# Altium PCB Module.PcbDoc (part 3 of 3)
Units mil, origin at the board's own origin, x right, y up, seen from the top; angles counter-clockwise.
Board outline 59055.12 x 27559.06 mil, 2 copper layers (Top Layer, Bottom Layer); 175 components, 152 nets, 576 pads, 116 vias.
Unrouted connection lines stored in the file: 153.
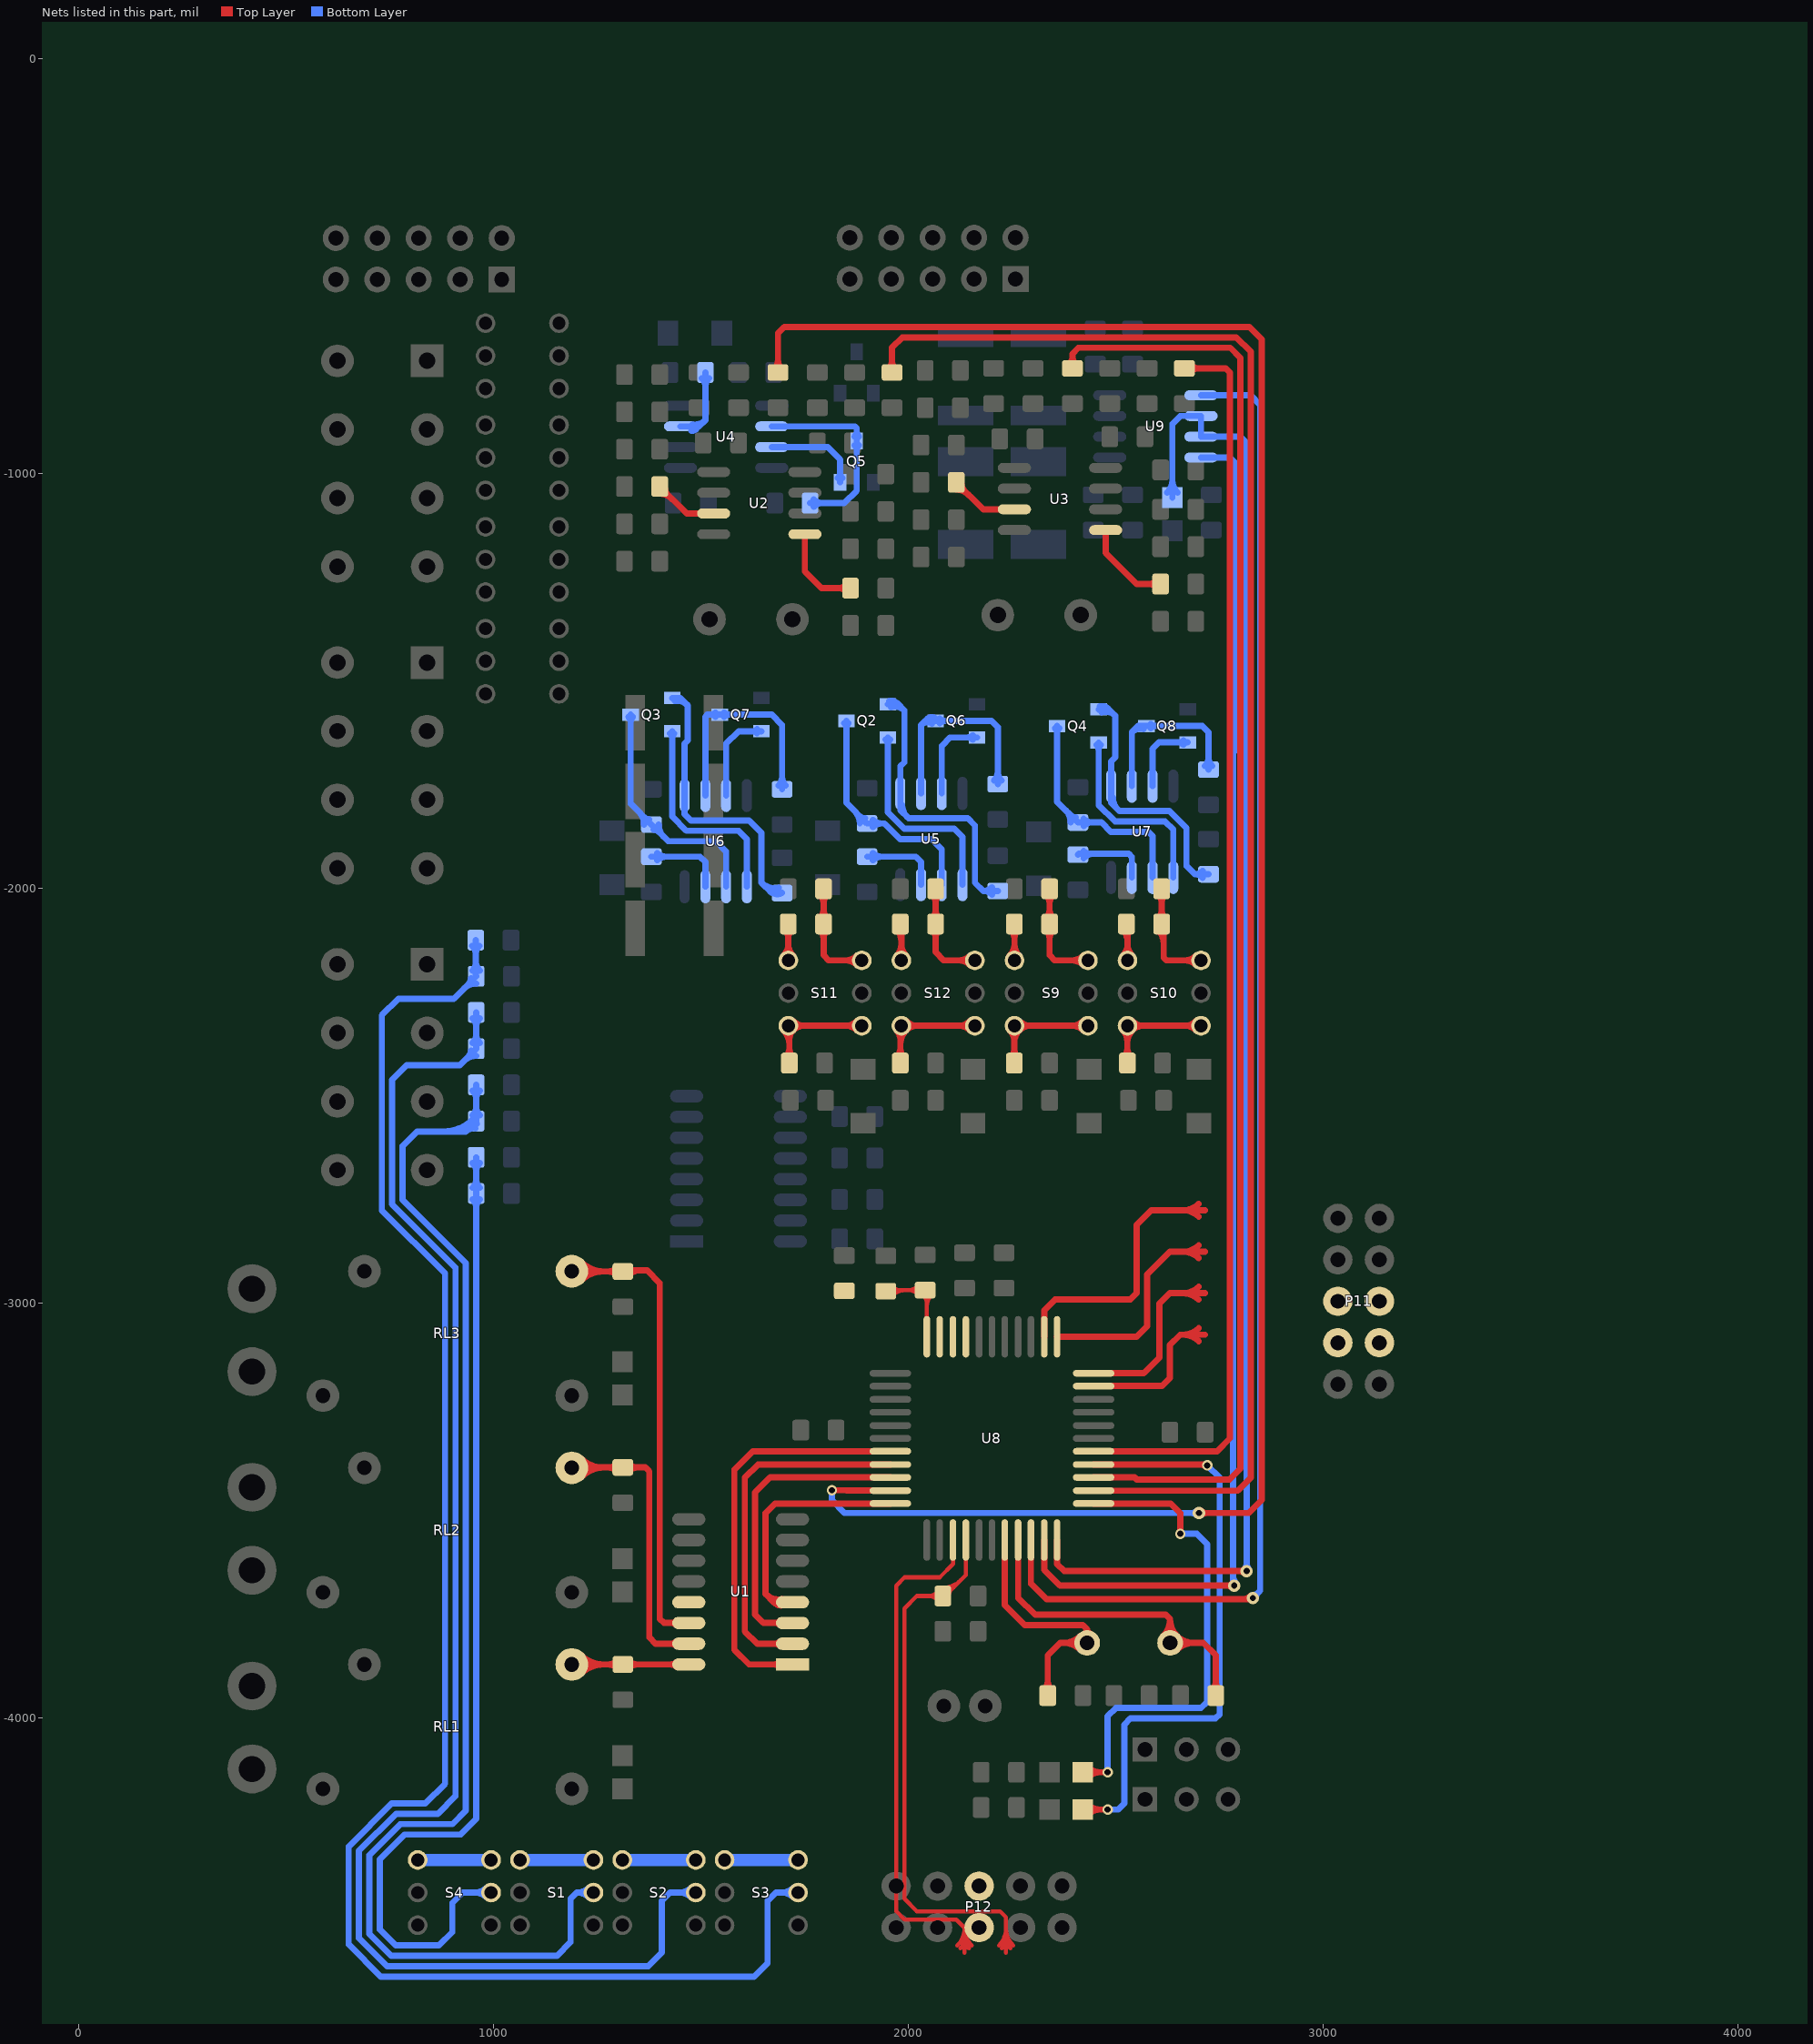
[diagram p3: the nets of this part, all layers, seen from the top]

## Via types
v1: diameter 25, hole 15, Top Layer to Bottom Layer, tented both sides, 99 vias
v2: diameter 30, hole 15, Top Layer to Bottom Layer, tented both sides, 9 vias
v3: diameter 35, hole 25, Top Layer to Bottom Layer, tented both sides, 7 vias
v4: diameter 35, hole 15, Top Layer to Bottom Layer, tented both sides, 1 vias

## Nets (pads, with @x,y where several pads share a name; then routed paths per layer and width w, separated by ;. In a path a pad name is that pad's centre, name@x,y a point inside that pad or via, vN(x,y) a via of type N, cw(c..) or ccw(c..) an arc to the next point about the centre after c; other vN are vias at no path point) (continued)
NetQ2_1: Q2.1 R41.1 U5.5 | length 850.4
  Bottom Layer w15: Q2.1@1950,-1555.67 1975,-1555.67 1990,-1570.67 ; Q2.1@1952.69,-1548.53 cw(c1958.75,-1567.26) 1972.67,-1553.34 ; Q2.1@1957.31,-1562.8 cw(c1967.23,-1593.44) 1990,-1570.67 ; Q2.1@1960.3,-1560.97 cw(c1973.11,-1573.78) 1973.11,-1555.67 cw(c1973.11,-1537.56) Q2.1@1960.3,-1550.37 ; U5.5@1984.5,-1798.67 ccw(c2024.33,-1798.67) 1996.17,-1826.84 ; R41.1@2201.12,-2014.47 ccw(c2180,-2035.42) 2180,-2005.67 ; R41.1@2201.12,-1996.87 cw(c2180,-1975.92) 2180,-2005.67 ; R41.1@2215,-2005.67 2180,-2005.67 ; 1990,-1570.67 1990,-1695.67 1980,-1705.67 1980,-1810.67 2000,-1830.67 2142.5,-1830.67 2160,-1848.17 2160,-1985.67 2180,-2005.67
NetQ2_2: Q2.2 U5.1 | length 528.5
  Bottom Layer w15: Q2.2@1944.7,-1640.97 cw(c1931.89,-1653.78) 1950,-1653.78 cw(c1968.11,-1653.78) Q2.2@1955.3,-1640.97 ; Q2.2@1950,-1635.67 1950,-1816.03 1980,-1846.03 1989.64,-1855.67 2110,-1855.67 2130,-1875.67 U5.1@2130,-1990.67
NetQ2_3: Q2.3 R48.2 U5.2 | length 682.3
  Bottom Layer w15: Q2.3@1844.7,-1600.97 cw(c1831.89,-1613.78) 1850,-1613.78 cw(c1868.11,-1613.78) Q2.3@1855.3,-1600.97 ; Q2.3@1850,-1595.67 1850,-1793.17 R48.2@1900,-1843.17 1941.79,-1843.17 1979.29,-1880.67 2055,-1880.67 2080,-1905.67 U5.2@2080,-1990.67 ; 1870.13,-1813.3 cw(c1840.25,-1843.17) R48.2@1882.5,-1843.17 ; R48.2@1882.2,-1825.37 ccw(c1895,-1812.56) R48.2@1895,-1830.67 ; R48.2@1913.84,-1852.01 cw(c1935.18,-1873.35) 1935.18,-1843.17 cw(c1935.18,-1812.99) R48.2@1913.84,-1834.33
NetQ3_1: Q3.1 R42.1 U6.5 | length 802.8
  Bottom Layer w15: Q3.1@1430,-1540.67 1450,-1540.67 1467.5,-1558.17 ; Q3.1@1436.2,-1548.07 cw(c1441.99,-1583.67) 1467.5,-1558.17 ; 1664.71,-2005.38 ccw(c1684.8,-1985.29) R42.1@1690.5,-2013.12 ; R42.1@1687.49,-1998.42 cw(c1678.09,-1952.58) 1645,-1985.67 ; R42.1@1695,-2010.67 1670,-2010.67 1645,-1985.67 ; 1467.5,-1558.17 1467.5,-1642.92 1460,-1650.42 1460,-1820.67 1475,-1835.67 1615,-1835.67 1645,-1865.67 1645,-1985.67
NetQ3_2: Q3.2 U6.1 | length 551.4
  Bottom Layer w15: Q3.2@1424.7,-1625.97 cw(c1411.89,-1638.78) 1430,-1638.78 cw(c1448.11,-1638.78) Q3.2@1435.3,-1625.97 ; Q3.2@1430,-1620.67 1430,-1826.03 1464.64,-1860.67 1590,-1860.67 1610,-1880.67 U6.1@1610,-1995.67
NetQ3_3: Q3.3 R49.2 U6.2 | length 700.9
  Bottom Layer w15: Q3.3@1324.7,-1585.97 cw(c1311.89,-1598.78) 1330,-1598.78 cw(c1348.11,-1598.78) Q3.3@1335.3,-1585.97 ; Q3.3@1330,-1580.67 1330,-1795.67 R49.2@1380,-1845.67 1420,-1885.67 1535,-1885.67 1560,-1910.67 U6.2@1560,-1995.67 ; 1350.13,-1815.8 cw(c1320.25,-1845.67) R49.2@1362.5,-1845.67 ; R49.2@1362.2,-1827.87 ccw(c1375,-1815.06) R49.2@1375,-1833.17 ; R49.2@1385,-1858.17 cw(c1385,-1876.28) R49.2@1397.8,-1863.47 ; R49.2@1397.5,-1845.67 ccw(c1439.75,-1845.67) 1409.87,-1875.54
NetQ4_1: Q4.1 R46.1 U7.5 | length 779.6
  Bottom Layer w15: Q4.1@2458.21,-1568.17 2483.21,-1568.17 2498.21,-1583.17 ; Q4.1@2460.9,-1561.04 cw(c2466.97,-1579.76) 2480.88,-1565.84 ; Q4.1@2465.52,-1575.31 cw(c2475.44,-1605.94) 2498.21,-1583.17 ; Q4.1@2468.51,-1573.47 cw(c2481.32,-1586.28) 2481.32,-1568.17 cw(c2481.32,-1550.06) Q4.1@2468.51,-1562.87 ; U7.5@2492.71,-1781.17 ccw(c2532.55,-1781.17) 2504.38,-1809.34 ; R46.1@2708.95,-1974.07 ccw(c2690,-1991.25) 2690,-1965.67 ; R46.1@2708.95,-1957.27 cw(c2690,-1940.09) 2690,-1965.67 ; R46.1@2723.21,-1965.67 2690,-1965.67 ; 2498.21,-1583.17 2498.21,-1683.17 2488.21,-1693.17 U7.5@2488.21,-1753.17 2488.21,-1793.17 2508.21,-1813.17 2628.57,-1813.17 2670,-1854.6 2670,-1945.67 2690,-1965.67
NetQ4_2: Q4.2 U7.1 | length 498.5
  Bottom Layer w15: Q4.2@2452.91,-1653.47 cw(c2440.1,-1666.28) 2458.21,-1666.28 cw(c2476.32,-1666.28) Q4.2@2463.51,-1653.47 ; Q4.2@2458.21,-1648.17 2458.21,-1798.53 2497.86,-1838.17 2618.21,-1838.17 2638.21,-1858.17 U7.1@2638.21,-1973.17
NetQ4_3: Q4.3 R51.2 U7.2 | length 669.9
  Bottom Layer w15: Q4.3@2352.91,-1613.47 cw(c2340.11,-1626.28) 2358.21,-1626.28 cw(c2376.32,-1626.28) Q4.3@2363.51,-1613.47 ; Q4.3@2358.21,-1608.17 2358.21,-1790.67 R51.2@2408.21,-1840.67 2465,-1840.67 2487.5,-1863.17 2578.21,-1863.17 2588.21,-1873.17 U7.2@2588.21,-1973.17 ; 2378.34,-1810.8 cw(c2348.46,-1840.67) R51.2@2390.71,-1840.67 ; R51.2@2390.41,-1822.87 ccw(c2403.21,-1810.06) R51.2@2403.21,-1828.17 ; R51.2@2422.05,-1849.51 cw(c2443.39,-1870.85) 2443.39,-1840.67 cw(c2443.39,-1810.49) R51.2@2422.05,-1831.83
NetQ5_2: Q5.2 U4.7 | length 260.9
  Bottom Layer w15: U4.7@1670,-935.67 1805,-935.67 1835,-965.67 Q5.2@1835,-1020.67 ; Q5.2@1829.7,-1010.37 ccw(c1816.89,-997.56) 1835,-997.56 ccw(c1853.11,-997.56) Q5.2@1840.3,-1010.37
NetQ5_3: Q5.3 R43.1 U4.6 | length 586.1
  Bottom Layer w15: U4.6@1670,-885.67 1870,-885.67 1875,-890.67 Q5.3@1875,-920.67 1875,-1035.67 1875,-1040.42 1844.75,-1070.67 R43.1@1762.5,-1070.67 ; R43.1@1771.34,-1079.51 cw(c1792.68,-1100.85) 1792.68,-1070.67 cw(c1792.68,-1040.49) R43.1@1771.34,-1061.83 ; Q5.3@1869.7,-930.97 cw(c1856.89,-943.78) 1875,-943.78 cw(c1893.11,-943.78) Q5.3@1880.3,-930.97 ; Q5.3@1869.7,-910.37 ccw(c1856.89,-897.56) 1875,-897.56 ccw(c1893.11,-897.56) Q5.3@1880.3,-910.37
NetQ6_2: Q6.2 U5.7 | length 236.7
  Bottom Layer w15: U5.7@2080,-1770.67 2080,-1655.67 2100,-1635.67 Q6.2@2165,-1635.67 ; Q6.2@2154.7,-1640.97 ccw(c2141.89,-1653.78) 2141.89,-1635.67 ccw(c2141.89,-1617.56) Q6.2@2154.7,-1630.37
NetQ6_3: Q6.3 R44.1 U5.6 | length 652.2
  Bottom Layer w15: U5.6@2030,-1770.67 2030,-1605.67 ; 2043.86,-1591.81 cw(c2055.52,-1603.47) Q6.3@2063.73,-1589.16 ; Q6.3@2054.7,-1600.97 ccw(c2041.89,-1613.78) 2041.89,-1595.67 ccw(c2041.89,-1577.56) Q6.3@2054.7,-1590.37 ; Q6.3@2056.27,-1602.18 ccw(c2045.42,-1621.09) 2030,-1605.67 ; Q6.3@2075.3,-1600.97 cw(c2088.11,-1613.78) 2088.11,-1595.67 cw(c2088.11,-1577.56) Q6.3@2075.3,-1590.37 ; R44.1@2206.16,-1739.33 ccw(c2184.82,-1717.99) 2215,-1717.99 ccw(c2245.18,-1717.99) R44.1@2223.84,-1739.33 ; R44.1@2215,-1748.17 2215,-1610.67 2200,-1595.67 Q6.3@2065,-1595.67 2040,-1595.67 2030,-1605.67
NetQ7_2: Q7.2 U6.7 | length 250.9
  Bottom Layer w15: U6.7@1560,-1775.67 1560,-1650.67 1590,-1620.67 Q7.2@1645,-1620.67 ; Q7.2@1634.7,-1625.97 ccw(c1621.89,-1638.78) 1621.89,-1620.67 ccw(c1621.89,-1602.56) Q7.2@1634.7,-1615.37
NetQ7_3: Q7.3 R45.1 U6.6 | length 646.7
  Bottom Layer w15: U6.6@1510,-1775.67 1510,-1585.67 1515,-1580.67 Q7.3@1545,-1580.67 1670,-1580.67 1695,-1605.67 R45.1@1695,-1760.67 ; Q7.3@1534.7,-1585.97 ccw(c1521.89,-1598.78) 1521.89,-1580.67 ccw(c1521.89,-1562.56) Q7.3@1534.7,-1575.37 ; Q7.3@1555.3,-1585.97 cw(c1568.11,-1598.78) 1568.11,-1580.67 cw(c1568.11,-1562.56) Q7.3@1555.3,-1575.37 ; R45.1@1686.16,-1751.83 ccw(c1664.82,-1730.49) 1695,-1730.49 ccw(c1725.18,-1730.49) R45.1@1703.84,-1751.83
NetQ8_2: Q8.2 U7.7 | length 209.2
  Bottom Layer w15: U7.7@2588.21,-1753.17 2588.21,-1663.17 2603.92,-1647.46 Q8.2@2672.5,-1647.46 ; 2648.39,-1647.46 cw(c2648.39,-1667.99) Q8.2@2662.91,-1653.47 ; 2651.82,-1647.46 ccw(c2651.82,-1631.78) Q8.2@2662.91,-1642.87
NetQ8_3: Q8.3 R47.1 U7.6 | length 631.5
  Bottom Layer w15: U7.6@2538.21,-1753.17 2538.21,-1623.17 ; Q8.3@2566.36,-1615.44 ccw(c2559.08,-1644.04) 2538.21,-1623.17 ; Q8.3@2583.51,-1613.47 cw(c2596.32,-1626.28) 2596.32,-1608.17 cw(c2596.32,-1590.06) Q8.3@2583.51,-1602.87 ; R47.1@2714.37,-1704.33 ccw(c2693.03,-1682.99) 2723.21,-1682.99 ccw(c2753.39,-1682.99) R47.1@2732.05,-1704.33 ; 2538.21,-1623.17 2553.21,-1608.17 Q8.3@2573.21,-1608.17 2708.21,-1608.17 2723.21,-1623.17 2723.21,-1690.67 ; R47.1@2716.61,-1702.56 ccw(c2709.21,-1690.67) 2723.21,-1690.67 ; R47.1@2716.61,-1702.56 ccw(c2709.21,-1690.67) 2723.21,-1690.67 ; R47.1@2716.61,-1702.56 ccw(c2709.21,-1690.67) 2723.21,-1690.67 ; 2723.21,-1690.67 ccw(c2737.21,-1690.67) R47.1@2729.81,-1702.56 ; 2723.21,-1690.67 ccw(c2737.21,-1690.67) R47.1@2729.81,-1702.56 ; 2723.21,-1690.67 ccw(c2737.21,-1690.67) R47.1@2729.81,-1702.56 ; 2723.21,-1690.67 R47.1@2723.21,-1713.17 2723.21,-1690.67
NetR20_2: R20.2 U2.1 | length 264
  Top Layer w15: U2.1@1750,-1145.67 1750,-1235.67 1790,-1275.67 R20.2@1860,-1275.67 ; R20.2@1851.16,-1284.51 ccw(c1829.82,-1305.85) 1829.82,-1275.67 ccw(c1829.82,-1245.49) R20.2@1851.16,-1266.83
NetR21_2: R21.2 U2.7 | length 204.3
  Top Layer w15: R21.2@1400,-1048.17 cw(c1400,-1090.42) 1429.87,-1060.54 ; R21.2@1400,-1030.67 1465,-1095.67 U2.7@1530,-1095.67 ; R21.2@1412.5,-1035.67 ccw(c1430.61,-1035.67) R21.2@1417.8,-1048.47
NetR22_2: R22.2 U3.1 | length 266
  Top Layer w15: U3.1@2475,-1135.67 2475,-1190.67 2550,-1265.67 R22.2@2607.5,-1265.67 ; R22.2@2598.66,-1274.51 ccw(c2577.32,-1295.85) 2577.32,-1265.67 ccw(c2577.32,-1235.49) R22.2@2598.66,-1256.83
NetR23_2: R23.2 U3.7 | length 214.3
  Top Layer w15: R23.2@2115,-1038.17 cw(c2115,-1080.42) 2144.87,-1050.54 ; R23.2@2115,-1020.67 2180,-1085.67 U3.7@2255,-1085.67 ; R23.2@2127.5,-1025.67 ccw(c2145.61,-1025.67) R23.2@2132.8,-1038.47
NetR24_1: R24.1 R28.1 S1.4 | length 3430.7
  Bottom Layer w15: 879.04,-2585.67 ccw(c879.04,-2487.2) R28.1@948.66,-2556.83 ; 915.25,-2585.67 ccw(c915.25,-2523.42) R28.1@959.27,-2567.44 ; R28.1@939.7,-2578.47 ccw(c926.89,-2565.67) R28.1@945,-2565.67 ; R28.1@948.66,-2546.83 ccw(c927.32,-2525.49) 957.5,-2525.49 ccw(c987.68,-2525.49) R28.1@966.34,-2546.83 ; R24.1@948.66,-2487.22 cw(c927.32,-2508.56) 957.5,-2508.56 cw(c987.68,-2508.56) R24.1@966.34,-2487.22 ; R28.1@955.66,-2578.03 ccw(c951.66,-2604.82) 932.5,-2585.67 ; R24.1@957.5,-2473.38 R28.1@957.5,-2560.67 932.5,-2585.67 ; S1.4@1228.85,-4432.07 ccw(c1201.33,-4459.59) 1201.33,-4420.67 ccw(c1201.33,-4381.75) S1.4@1228.85,-4409.27 ; S1.4@1240.25,-4420.67 1200,-4420.67 1185,-4435.67 1185,-4540.67 1152.5,-4573.17 752.86,-4573.17 700,-4520.31 700,-4330.31 774.64,-4255.67 900,-4255.67 932.5,-4223.17 932.5,-2903.17 780,-2750.67 780,-2620.67 815,-2585.67 932.5,-2585.67
NetR25_1: R25.1 R29.1 S2.4 | length 3799.1
  Bottom Layer w15: 927.63,-2415.97 cw(c957.5,-2445.85) R29.1@957.5,-2403.6 ; R29.1@939.7,-2403.9 ccw(c926.89,-2391.1) R29.1@945,-2391.1 ; R29.1@948.66,-2372.26 ccw(c927.32,-2350.92) 957.5,-2350.92 ccw(c987.68,-2350.92) R29.1@966.34,-2372.26 ; R25.1@948.66,-2312.65 cw(c927.32,-2333.99) 957.5,-2333.99 cw(c987.68,-2333.99) R25.1@966.34,-2312.65 ; R25.1@957.5,-2298.81 R29.1@957.5,-2386.1 917.93,-2425.67 790,-2425.67 755,-2460.67 755,-2761.03 907.5,-2913.53 907.5,-4188.17 865,-4230.67 764.29,-4230.67 675,-4319.96 675,-4530.67 742.5,-4598.17 1372.5,-4598.17 1405,-4565.67 1405,-4440.67 1425,-4420.67 S2.4@1486.92,-4420.67 ; S2.4@1475.52,-4432.07 ccw(c1447.99,-4459.59) 1447.99,-4420.67 ccw(c1447.99,-4381.75) S2.4@1475.52,-4409.27
NetR26_1: R26.1 R30.1 S3.4 | length 4291.9
  Bottom Layer w15: 927.63,-2241.4 cw(c957.5,-2271.27) R30.1@957.5,-2229.02 ; R30.1@939.7,-2229.33 ccw(c926.89,-2216.52) R30.1@945,-2216.52 ; R26.1@947.66,-2138.08 cw(c926.32,-2159.42) 956.5,-2159.42 cw(c986.68,-2159.42) R26.1@965.34,-2138.08 ; R30.1@948.66,-2197.68 ccw(c929.74,-2178.76) 956.5,-2178.76 ; 956.5,-2173.93 ccw(c990.09,-2173.93) R30.1@966.34,-2197.68 ; R26.1@956.5,-2124.24 956.5,-2210.52 R30.1@957.5,-2211.52 903.35,-2265.67 770,-2265.67 730,-2305.67 730,-2776.03 882.5,-2928.53 882.5,-4158.17 835,-4205.67 753.93,-4205.67 650,-4309.6 650,-4545.67 727.5,-4623.17 1627.5,-4623.17 1660,-4590.67 1660,-4440.67 1680,-4420.67 S3.4@1733.58,-4420.67 ; S3.4@1722.18,-4432.07 ccw(c1694.66,-4459.59) 1694.66,-4420.67 ccw(c1694.66,-4381.75) S3.4@1722.18,-4409.27
NetR27_1: R27.1 R31.1 S4.4 | length 2619
  Bottom Layer w15: R31.1@948.66,-2749.08 cw(c927.32,-2770.42) 957.5,-2770.42 cw(c987.68,-2770.42) R31.1@966.34,-2749.08 ; R31.1@948.66,-2721.4 ccw(c927.32,-2700.06) 957.5,-2700.06 ccw(c987.68,-2700.06) R31.1@966.34,-2721.4 ; R27.1@948.66,-2661.79 cw(c927.32,-2683.13) 957.5,-2683.13 cw(c987.68,-2683.13) R27.1@966.34,-2661.79 ; R27.1@957.5,-2647.95 R31.1@957.5,-2735.24 957.5,-4243.17 920,-4280.67 785,-4280.67 725,-4340.67 725,-4509.96 763.21,-4548.17 867.5,-4548.17 900,-4515.67 900,-4445.67 925,-4420.67 S4.4@993.58,-4420.67 ; S4.4@982.18,-4432.07 ccw(c954.66,-4459.59) 954.66,-4420.67 ccw(c954.66,-4381.75) S4.4@982.18,-4409.27
NetR36_1: R36.1 U4.3 | length 276.2
  Bottom Layer w15: U4.3@1450,-885.67 1495,-885.67 1510,-870.67 ; U4.3@1476.56,-896.07 ccw(c1478.53,-881.87) 1488.66,-892.01 ; U4.3@1478.62,-881.21 ccw(c1483.71,-844.38) 1510,-870.67 ; R36.1@1501.16,-769.51 cw(c1479.82,-790.85) 1510,-790.85 cw(c1540.18,-790.85) R36.1@1518.84,-769.51 ; R36.1@1510,-755.67 1510,-870.67
NetR37_1: R37.1 U5.3 | length 237.6
  Bottom Layer w15: R37.1@1900,-1923.17 2017.5,-1923.17 2030,-1935.67 U5.3@2030,-1990.67 ; R37.1@1913.84,-1932.01 cw(c1935.18,-1953.35) 1935.18,-1923.17 cw(c1935.18,-1892.99) R37.1@1913.84,-1914.33
NetR38_1: R38.1 U6.3 | length 242.6
  Bottom Layer w15: R38.1@1380,-1923.17 1497.5,-1923.17 1510,-1935.67 U6.3@1510,-1995.67 ; R38.1@1393.84,-1932.01 cw(c1415.18,-1953.35) 1415.18,-1923.17 cw(c1415.18,-1892.99) R38.1@1393.84,-1914.33
NetR39_1: R39.1 U7.3 | length 231.5
  Bottom Layer w15: R39.1@2408.21,-1918.17 2410.71,-1915.67 2530.71,-1915.67 2538.21,-1923.17 U7.3@2538.21,-1973.17 ; R39.1@2422.05,-1927.01 cw(c2449.42,-1954.38) 2449.42,-1915.67 ; R39.1@2422.05,-1909.33 ccw(c2437.35,-1894.03) 2437.35,-1915.67
NetR52_1: R52.1 S9.2 | length 196.2
  Top Layer w15: S9.2@2243.82,-2161.79 ccw(c2216.3,-2134.27) 2255.22,-2134.27 ccw(c2294.15,-2134.27) S9.2@2266.62,-2161.79 ; R52.1@2246.16,-2099.51 cw(c2224.28,-2121.39) 2255.22,-2121.39 ; R52.1@2255,-2085.67 2255.22,-2085.89 S9.2@2255.22,-2173.19 ; 2255.22,-2120.31 cw(c2284.64,-2120.31) R52.1@2263.84,-2099.51
NetR52_2: R52.2 R54.1 S9.5 | length 460.9
  Top Layer w15: R52.2@2331.16,-2099.51 cw(c2309.82,-2120.85) 2340,-2120.85 cw(c2370.18,-2120.85) R52.2@2348.84,-2099.51 ; R52.2@2331.16,-2071.83 ccw(c2309.82,-2050.49) 2340,-2050.49 ccw(c2370.18,-2050.49) R52.2@2348.84,-2071.83 ; R54.1@2331.16,-2014.51 cw(c2309.82,-2035.85) 2340,-2035.85 cw(c2370.18,-2035.85) R54.1@2348.84,-2014.51 ; R54.1@2340,-2000.67 R52.2@2340,-2085.67 2340,-2160.67 2352.52,-2173.19 S9.5@2432.39,-2173.19 ; S9.5@2420.99,-2184.59 ccw(c2393.47,-2212.11) 2393.47,-2173.19 ccw(c2393.47,-2134.27) S9.5@2420.99,-2161.79
NetR53_1: R53.1 S10.2 | length 197.2
  Top Layer w15: R53.1@2516.16,-2099.51 cw(c2487.98,-2127.69) 2527.84,-2127.69 ; S10.2@2516.44,-2161.79 ccw(c2488.91,-2134.27) 2527.84,-2134.27 ccw(c2566.76,-2134.27) S10.2@2539.24,-2161.79 ; R53.1@2525,-2085.67 2527.84,-2088.51 S10.2@2527.84,-2173.19 ; 2527.84,-2114 cw(c2548.33,-2114) R53.1@2533.84,-2099.51
NetR53_2: R53.2 R56.1 S10.5 | length 453.2
  Top Layer w15: R53.2@2601.16,-2099.51 cw(c2567.75,-2132.92) 2615,-2132.92 ; R53.2@2601.16,-2071.83 ccw(c2579.82,-2050.49) 2610,-2050.49 ccw(c2640.18,-2050.49) R53.2@2618.84,-2071.83 ; R56.1@2601.16,-2014.51 cw(c2579.82,-2035.85) 2610,-2035.85 cw(c2640.18,-2035.85) R56.1@2618.84,-2014.51 ; R56.1@2610,-2000.67 R53.2@2610,-2085.67 2615,-2090.67 2615,-2165.67 2622.52,-2173.19 S10.5@2705,-2173.19 ; S10.5@2693.6,-2184.59 ccw(c2666.08,-2212.11) 2666.08,-2173.19 ccw(c2666.08,-2134.27) S10.5@2693.6,-2161.79
NetR55_1: R55.1 S9.3 S9.6 | length 498.1
  Top Layer w15: S9.3@2243.82,-2342.07 cw(c2216.84,-2369.05) 2255,-2369.05 ; R55.1@2246.16,-2406.83 ccw(c2224.82,-2385.49) 2255,-2385.49 ccw(c2285.18,-2385.49) R55.1@2263.84,-2406.83 ; R55.1@2255,-2420.67 2255,-2330.89 S9.3@2255.22,-2330.67 S9.6@2432.39,-2330.67 ; 2255,-2370.13 cw(c2294.68,-2370.13) 2266.62,-2342.07 cw(c2294.15,-2369.59) 2294.15,-2330.67 cw(c2294.15,-2291.75) S9.3@2266.62,-2319.27 ; S9.6@2420.99,-2342.07 ccw(c2393.47,-2369.59) 2393.47,-2330.67 ccw(c2393.47,-2291.75) S9.6@2420.99,-2319.27
NetR57_1: R57.1 S10.3 S10.6 | length 498.1
  Top Layer w15: S10.3@2516.44,-2342.07 cw(c2489.72,-2368.78) 2527.5,-2368.78 ; R57.1@2518.66,-2406.83 ccw(c2497.32,-2385.49) 2527.5,-2385.49 ccw(c2557.68,-2385.49) R57.1@2536.34,-2406.83 ; R57.1@2527.5,-2420.67 2527.5,-2331.01 S10.3@2527.84,-2330.67 S10.6@2705,-2330.67 ; 2527.5,-2370.4 cw(c2567.57,-2370.4) 2539.24,-2342.07 cw(c2566.76,-2369.59) 2566.76,-2330.67 cw(c2566.76,-2291.75) S10.3@2539.24,-2319.27 ; S10.6@2693.6,-2342.07 ccw(c2666.08,-2369.59) 2666.08,-2330.67 ccw(c2666.08,-2291.75) S10.6@2693.6,-2319.27
NetR60_1: R60.1 S11.2 | length 196.1
  Top Layer w15: S11.2@1698.6,-2161.79 ccw(c1671.08,-2134.27) 1710,-2134.27 ccw(c1748.92,-2134.27) S11.2@1721.4,-2161.79 ; R60.1@1701.16,-2099.51 cw(c1679.82,-2120.85) 1710,-2120.85 cw(c1740.18,-2120.85) R60.1@1718.84,-2099.51 ; S11.2@1710,-2173.19 R60.1@1710,-2085.67
NetR60_2: R60.2 R62.1 S11.5 | length 460.7
  Top Layer w15: R60.2@1786.16,-2099.51 cw(c1764.82,-2120.85) 1795,-2120.85 cw(c1825.18,-2120.85) R60.2@1803.84,-2099.51 ; R60.2@1786.16,-2071.83 ccw(c1764.82,-2050.49) 1795,-2050.49 ccw(c1825.18,-2050.49) R60.2@1803.84,-2071.83 ; R62.1@1786.16,-2014.51 cw(c1764.82,-2035.85) 1795,-2035.85 cw(c1825.18,-2035.85) R62.1@1803.84,-2014.51 ; R62.1@1795,-2000.67 R60.2@1795,-2085.67 1795,-2160.67 1807.52,-2173.19 S11.5@1887.16,-2173.19 ; S11.5@1875.76,-2184.59 ccw(c1848.24,-2212.11) 1848.24,-2173.19 ccw(c1848.24,-2134.27) S11.5@1875.76,-2161.79
NetR61_1: R61.1 S12.2 | length 197.1
  Top Layer w15: R61.1@1971.16,-2099.51 cw(c1943.52,-2127.15) 1982.61,-2127.15 ; S12.2@1971.21,-2161.79 ccw(c1943.69,-2134.27) 1982.61,-2134.27 ccw(c2021.53,-2134.27) S12.2@1994.01,-2161.79 ; R61.1@1980,-2085.67 1982.61,-2088.28 S12.2@1982.61,-2173.19 ; 1982.61,-2114.54 cw(c2003.87,-2114.54) R61.1@1988.84,-2099.51
NetR61_2: R61.2 R64.1 S12.5 | length 458.9
  Top Layer w15: R61.2@2056.16,-2099.51 cw(c2034.82,-2120.85) 2065,-2120.85 cw(c2095.18,-2120.85) R61.2@2073.84,-2099.51 ; R61.2@2056.16,-2071.83 ccw(c2034.82,-2050.49) 2065,-2050.49 ccw(c2095.18,-2050.49) R61.2@2073.84,-2071.83 ; R64.1@2056.16,-2014.51 cw(c2034.82,-2035.85) 2065,-2035.85 cw(c2095.18,-2035.85) R64.1@2073.84,-2014.51 ; R64.1@2065,-2000.67 R61.2@2065,-2085.67 2065,-2153.19 2085,-2173.19 S12.5@2159.78,-2173.19 ; S12.5@2148.38,-2184.59 ccw(c2120.85,-2212.11) 2120.85,-2173.19 ccw(c2120.85,-2134.27) S12.5@2148.38,-2161.79
NetR63_1: R63.1 S11.3 S11.6 | length 499
  Top Layer w15: S11.3@1698.6,-2342.07 cw(c1665.04,-2375.63) 1712.5,-2375.63 ; R63.1@1703.66,-2406.83 ccw(c1682.32,-2385.49) 1712.5,-2385.49 ccw(c1742.68,-2385.49) R63.1@1721.34,-2406.83 ; R63.1@1712.5,-2420.67 1712.5,-2333.17 S11.3@1710,-2330.67 S11.6@1887.16,-2330.67 ; 1712.5,-2363.56 cw(c1742.89,-2363.56) 1721.4,-2342.07 cw(c1748.92,-2369.59) 1748.92,-2330.67 cw(c1748.92,-2291.75) S11.3@1721.4,-2319.27 ; S11.6@1875.76,-2342.07 ccw(c1848.24,-2369.59) 1848.24,-2330.67 ccw(c1848.24,-2291.75) S11.6@1875.76,-2319.27
NetR65_1: R65.1 S12.3 S12.6 | length 499.1
  Top Layer w15: R65.1@1971.16,-2406.83 ccw(c1949.82,-2385.49) 1980,-2385.49 ccw(c2010.18,-2385.49) R65.1@1988.84,-2406.83 ; S12.3@1971.21,-2342.07 cw(c1950,-2363.29) 1980,-2363.29 ; R65.1@1980,-2420.67 1980,-2333.28 S12.3@1982.61,-2330.67 S12.6@2159.78,-2330.67 ; 1980,-2375.9 cw(c2027.84,-2375.9) 1994.01,-2342.07 cw(c2021.53,-2369.59) 2021.53,-2330.67 cw(c2021.53,-2291.75) S12.3@1994.01,-2319.27 ; S12.6@2148.38,-2342.07 ccw(c2120.85,-2369.59) 2120.85,-2330.67 ccw(c2120.85,-2291.75) S12.6@2148.38,-2319.27
NetS1_2: S1.2 S1.5 | length 177.2
  Bottom Layer w30: S1.2@1063.08,-4341.93 S1.5@1240.25,-4341.93
NetS2_2: S2.2 S2.5 | length 177.2
  Bottom Layer w30: S2.2@1309.75,-4341.93 S2.5@1486.92,-4341.93
NetS3_2: S3.2 S3.5 | length 177.2
  Bottom Layer w30: S3.2@1556.42,-4341.93 S3.5@1733.58,-4341.93
NetS4_2: S4.2 S4.5 | length 177.2
  Bottom Layer w30: S4.2@816.42,-4341.93 S4.5@993.58,-4341.93
NOUSE1: D7.2 U8.12 | length 1239.7
  Top Layer w15: D7.2@2420,-4130.67 v1(2480,-4130.67) ; D7.2@2432.37,-4143.04 cw(c2462.25,-4172.92) 2462.25,-4130.67 cw(c2462.25,-4088.42) D7.2@2432.37,-4118.3 ; U8.12@2446,-3482.67 2632,-3482.67 2655,-3505.67 v1(2655,-3555.67)
  Bottom Layer w15: v1(2480,-4130.67) 2480,-3995.67 2500,-3975.67 2705,-3975.67 2720,-3960.67 2720,-3580.67 2695,-3555.67 v1(2655,-3555.67)
NOUSE2: D8.2 U8.15 | length 1508.9
  Top Layer w15: D8.2@2420,-4220.67 v1(2480,-4220.67) ; D8.2@2432.37,-4233.04 cw(c2462.25,-4262.92) 2462.25,-4220.67 cw(c2462.25,-4178.42) D8.2@2432.37,-4208.3 ; U8.15@2446,-3388.67 2718,-3388.67 cw(c2718,-3390.67) v1(2720,-3390.67) ; 2703.1,-3388.67 cw(c2703.1,-3407.57) v1@2716.46,-3394.21
  Bottom Layer w15: v1(2480,-4220.67) 2505,-4220.67 2520,-4205.67 2520,-4015.67 2535,-4000.67 2740,-4000.67 2750,-3990.67 2750,-3420.67 v1(2720,-3390.67) ; v1@2720,-3385.67 v1@2722.5,-3388.17
NOUSE3: U8.32
NOUSE4: U8.31
NOUSE5: U8.30
OUT1: R5.2 RL1.2 U1.16 | length 590.1
  Top Layer w15: RL1.2@1188,-3870.67 R5.2@1311,-3870.67 U1.16@1470,-3870.67 ; RL1.2@1199.93,-3882.6 cw(c1228.73,-3911.4) 1228.73,-3870.67 cw(c1228.73,-3829.94) RL1.2@1199.93,-3858.74 ; RL1.2@1210.54,-3893.21 cw(c1264.94,-3947.61) 1264.94,-3870.67 cw(c1264.94,-3793.73) RL1.2@1210.54,-3848.13 ; R5.2@1297.16,-3879.51 ccw(c1275.82,-3900.85) 1275.82,-3870.67 ccw(c1275.82,-3840.49) R5.2@1297.16,-3861.83 ; R5.2@1324.84,-3879.51 cw(c1346.18,-3900.85) 1346.18,-3870.67 cw(c1346.18,-3840.49) R5.2@1324.84,-3861.83 ; U1.16@1439.7,-3875.97 ccw(c1426.89,-3888.78) 1426.89,-3870.67 ccw(c1426.89,-3852.56) U1.16@1439.7,-3865.37
OUT2: R6.2 RL2.2 U1.15 | length 971.5
  Top Layer w15: RL2.2@1188,-3396.67 1189,-3395.67 R6.2@1311,-3395.67 1365,-3395.67 1375,-3405.67 1375,-3805.67 1390,-3820.67 U1.15@1470,-3820.67 ; RL2.2@1199.93,-3408.6 cw(c1231.14,-3439.81) 1231.14,-3395.67 ; RL2.2@1210.54,-3419.21 cw(c1267.36,-3476.03) 1267.36,-3395.67 ; RL2.2@1210.54,-3374.13 ccw(c1262.53,-3322.14) 1262.53,-3395.67 ; R6.2@1297.16,-3404.51 ccw(c1275.82,-3425.85) 1275.82,-3395.67 ccw(c1275.82,-3365.49) R6.2@1297.16,-3386.83 ; R6.2@1324.84,-3404.51 cw(c1346.18,-3425.85) 1346.18,-3395.67 cw(c1346.18,-3365.49) R6.2@1324.84,-3386.83 ; U1.15@1439.7,-3825.97 ccw(c1426.89,-3838.78) 1426.89,-3820.67 ccw(c1426.89,-3802.56) U1.15@1439.7,-3815.37
OUT3: R7.2 RL3.2 U1.14 | length 1417.9
  Top Layer w15: RL3.2@1188,-2922.67 1188.5,-2923.17 R7.2@1311,-2923.17 1313.5,-2920.67 1370,-2920.67 1400,-2950.67 1400,-3760.67 1410,-3770.67 U1.14@1470,-3770.67 ; RL3.2@1199.93,-2934.6 cw(c1227.52,-2962.19) 1227.52,-2923.17 ; RL3.2@1199.93,-2910.74 ccw(c1229.93,-2880.74) 1229.93,-2923.17 ; RL3.2@1210.54,-2945.21 cw(c1263.73,-2998.4) 1263.73,-2923.17 ; RL3.2@1210.54,-2900.13 ccw(c1266.15,-2844.52) 1266.15,-2923.17 ; R7.2@1297.16,-2932.01 ccw(c1275.82,-2953.35) 1275.82,-2923.17 ccw(c1275.82,-2892.99) R7.2@1297.16,-2914.33 ; R7.2@1324.84,-2932.01 cw(c1352.21,-2959.38) 1352.21,-2920.67 ; R7.2@1324.84,-2914.33 ccw(c1340.14,-2899.03) 1340.14,-2920.67 ; U1.14@1439.7,-3775.97 ccw(c1426.89,-3788.78) 1426.89,-3770.67 ccw(c1426.89,-3752.56) U1.14@1439.7,-3765.37
OUT4: U1.13
OUTPUT1: U1.1 U8.40 | length 1012.2
  Top Layer w15: U1.1@1689.7,-3875.97 ccw(c1676.89,-3888.78) 1676.89,-3870.67 ccw(c1676.89,-3852.56) U1.1@1689.7,-3865.37 ; U1.1@1720,-3870.67 1615,-3870.67 1580,-3835.67 1580,-3400.67 1624,-3356.67 U8.40@1956,-3356.67
OUTPUT2: U1.2 U8.41 | length 890.1
  Top Layer w15: U1.2@1689.7,-3825.97 ccw(c1676.89,-3838.78) 1676.89,-3820.67 ccw(c1676.89,-3802.56) U1.2@1689.7,-3815.37 ; U1.2@1720,-3820.67 1635,-3820.67 1605,-3790.67 1605,-3420.67 1637,-3388.67 U8.41@1956,-3388.67
OUTPUT3: U1.3 U8.42 | length 762.4
  Top Layer w15: U1.3@1689.7,-3775.97 ccw(c1676.89,-3788.78) 1676.89,-3770.67 ccw(c1676.89,-3752.56) U1.3@1689.7,-3765.37 ; U1.3@1720,-3770.67 1650,-3770.67 1630,-3750.67 1630,-3456.03 1666.36,-3419.67 U8.42@1956,-3419.67
OUTPUT4: U1.4 U8.44 | length 671.9
  Top Layer w15: 1675.79,-3721.46 ccw(c1692.47,-3704.79) U1.4@1696.18,-3728.08 ; U1.4@1689.7,-3725.97 ccw(c1676.89,-3738.78) 1676.89,-3720.67 ccw(c1676.89,-3702.56) U1.4@1689.7,-3715.37 ; U1.4@1693.82,-3713.26 cw(c1686.75,-3668.92) 1655,-3700.67 ; U1.4@1720,-3720.67 1675,-3720.67 1655,-3700.67 ; U8.44@1956,-3482.67 1678,-3482.67 1655,-3505.67 1655,-3700.67
PWM1: R3.2 U8.16 | length 3073.4
  Top Layer w15: U8.16@2446,-3356.67 2744,-3356.67 2775,-3325.67 2775,-755.67 2765,-745.67 R3.2@2665,-745.67 ; R3.2@2678.84,-754.51 cw(c2700.18,-775.85) 2700.18,-745.67 cw(c2700.18,-715.49) R3.2@2678.84,-736.83
PWM2: R4.2 U8.14 | length 3548.5
  Top Layer w15: R4.2@2386.16,-736.83 ccw(c2364.82,-715.49) 2395,-715.49 ccw(c2425.18,-715.49) R4.2@2403.84,-736.83 ; R4.2@2395,-745.67 2395,-710.67 2409.64,-696.03 2775.36,-696.03 2800,-720.67 2800,-3398.67 2774,-3424.67 2550,-3424.67 2545,-3419.67 U8.14@2446,-3419.67
PWM3: R1.2 U8.13 | length 4103.8
  Top Layer w15: R1.2@1951.16,-746.83 ccw(c1929.82,-725.49) 1960,-725.49 ccw(c1990.18,-725.49) R1.2@1968.84,-746.83 ; R1.2@1960,-755.67 1960,-695.67 1984.64,-671.03 2790.36,-671.03 2825,-705.67 2825,-3420.67 2794,-3451.67 U8.13@2446,-3451.67
PWM4: R2.2 U8.43 | length 5515.1
  Top Layer w15: R2.2@1676.16,-746.83 ccw(c1654.82,-725.49) 1685,-725.49 ccw(c1715.18,-725.49) R2.2@1693.84,-746.83 ; R2.2@1685,-755.67 1685,-661.38 1700.36,-646.03 2821.87,-646.03 2851.52,-675.67 2851.52,-3474.15 2820,-3505.67 v2(2700,-3505.67) ; v1(1815,-3450.67) 1955,-3450.67 U8.43@1956,-3451.67 1851,-3451.67 ; v2@2705.3,-3510.97 cw(c2718.11,-3523.78) 2718.11,-3505.67 cw(c2718.11,-3487.56) v2@2705.3,-3500.37
  Bottom Layer w15: v1(1815,-3450.67) 1815,-3474.71 1845.96,-3505.67 v2(2700,-3505.67) ; v2@2694.7,-3510.97 ccw(c2681.89,-3523.78) 2681.89,-3505.67 ccw(c2681.89,-3487.56) v2@2694.7,-3500.37
R/TXD: D4.1 U8.11 U9.2 U9.3 | length 3786.3
  Top Layer w15: U8.11@2358,-3570.67 2358,-3628.67 2375,-3645.67 v2(2815,-3645.67) ; v2@2809.7,-3650.97 ccw(c2796.89,-3663.78) 2796.89,-3645.67 ccw(c2796.89,-3627.56) v2@2809.7,-3640.37
  Bottom Layer w15: D4.1@2623.63,-1045.19 ccw(c2593.75,-1015.32) 2636,-1015.32 ccw(c2678.25,-1015.32) D4.1@2648.37,-1045.19 ; D4.1@2636,-1057.56 2636,-879.67 2655,-860.67 U9.2@2705,-860.67 U9.3@2705,-910.67 2800,-910.67 2815,-925.67 v2(2815,-3645.67) ; v2@2809.7,-3640.37 ccw(c2796.89,-3627.56) 2815,-3627.56 ccw(c2833.11,-3627.56) v2@2820.3,-3640.37
RESET: P12.6 R59.1 U8.4 | length 1599.8
  Top Layer w10: R59.1@2071.89,-3716.28 ccw(c2046.29,-3741.88) 2046.29,-3705.67 ccw(c2046.29,-3669.46) R59.1@2071.89,-3695.06 ; R59.1@2082.5,-3705.67 2020,-3705.67 1990,-3735.67 1990,-4435.67 2020,-4465.67 2220,-4465.67 2235,-4480.67 2235,-4565.67 ; R59.1@2082.5,-3695.67 ccw(c2082.5,-3659.46) 2108.11,-3685.06 ; R59.1@2082.5,-3685.67 ccw(c2082.5,-3625.31) 2125.18,-3667.99 ; R59.1@2087.5,-3705.67 2138,-3655.17 U8.4@2138,-3570.67 ; R59.1@2097.5,-3700.67 cw(c2109.57,-3700.67) R59.1@2101.04,-3692.13 ; 2217.66,-4548.33 ccw(c2175.79,-4506.46) 2235,-4506.46 ccw(c2294.21,-4506.46) 2252.34,-4548.33 ; 2224.73,-4555.4 ccw(c2199.93,-4530.6) 2235,-4530.6 ccw(c2270.07,-4530.6) 2245.27,-4555.4
RXD: U8.9 U9.1 | length 3742.5
  Top Layer w15: U8.9@2295,-3570.67 2295,-3675.67 2332.5,-3713.17 2827.5,-3713.17 v2(2830,-3710.67) ; 2805.86,-3713.17 ccw(c2805.86,-3686.53) v2@2824.7,-3705.37
  Bottom Layer w15: U9.1@2705,-810.67 2825,-810.67 2847.5,-833.17 2847.5,-3693.17 v2(2830,-3710.67) ; v2@2830,-3703.17 ccw(c2830,-3685.06) 2842.8,-3697.87 ccw(c2855.61,-3710.67) v2@2837.5,-3710.67
SCK: P12.5 U8.3 | length 1391.2
  Top Layer w10: U8.3@2107,-3570.67 2107,-3628.67 2075,-3660.67 1990,-3660.67 1970,-3680.67 1970,-4465.67 1990,-4485.67 2115,-4485.67 2135,-4505.67 2135,-4565.67 ; 2117.66,-4548.33 ccw(c2075.79,-4506.46) 2135,-4506.46 ccw(c2194.21,-4506.46) 2152.34,-4548.33 ; 2124.73,-4555.4 ccw(c2099.93,-4530.6) 2135,-4530.6 ccw(c2170.07,-4530.6) 2145.27,-4555.4
TCK: P11.6 U8.21 | length 450.8
  Top Layer w15: U8.21@2446,-3199.67 2446.5,-3199.17 2611.5,-3199.17 2630,-3180.67 2630,-3100.67 2655,-3075.67 2715,-3075.67 ; 2699.42,-3091.25 ccw(c2661.82,-3128.85) 2661.82,-3075.67 ccw(c2661.82,-3022.49) 2699.42,-3060.09
TDI: P11.3 U8.24 | length 732
  Top Layer w15: U8.24@2327,-3080.67 2327,-3016.71 2353.04,-2990.67 2535,-2990.67 2550,-2975.67 2550,-2810.67 2585,-2775.67 2715,-2775.67 ; 2699.42,-2791.25 ccw(c2661.82,-2828.85) 2661.82,-2775.67 ccw(c2661.82,-2722.49) 2699.42,-2760.09
TDO: P11.4 U8.23 | length 598.7
  Top Layer w15: U8.23@2358,-3080.67 2550,-3080.67 2575,-3055.67 2575,-2930.67 2630,-2875.67 2715,-2875.67 ; 2699.42,-2891.25 ccw(c2661.82,-2928.85) 2661.82,-2875.67 ccw(c2661.82,-2822.49) 2699.42,-2860.09
TMS: P11.5 U8.22 | length 508.6
  Top Layer w15: U8.22@2446,-3168.67 2567,-3168.67 2605,-3130.67 2605,-3000.67 2630,-2975.67 2715,-2975.67 ; 2699.42,-2991.25 ccw(c2661.82,-3028.85) 2661.82,-2975.67 ccw(c2661.82,-2922.49) 2699.42,-2960.09
TXD: U8.10 U9.4 | length 3476
  Top Layer w15: U8.10@2327,-3570.67 2327,-3642.67 2365,-3680.67 v2(2785,-3680.67) ; v2@2779.7,-3685.97 ccw(c2766.89,-3698.78) 2766.89,-3680.67 ccw(c2766.89,-3662.56) v2@2779.7,-3675.37
  Bottom Layer w15: U9.4@2705,-960.67 2775,-960.67 2785,-970.67 2785,-1670.67 ; 2782.5,-3656.53 ccw(c2809.14,-3656.53) v2@2790.3,-3675.37 ; v2(2785,-3680.67) 2782.5,-3678.17 2782.5,-1588.53 2785,-1586.02
XTAL1: C28.1 U8.8 Y1.1 | length 1029.5
  Top Layer w15: U8.8@2264,-3570.67 2264,-3709.67 2305,-3750.67 2620,-3750.67 2630.5,-3761.17 Y1.1@2630.5,-3818.67 2710.5,-3818.67 2740.5,-3848.67 C28.1@2740.5,-3945.76 ; Y1.1@2613.88,-3802.05 ccw(c2573.77,-3761.94) 2630.5,-3761.94 ccw(c2687.23,-3761.94) 2647.12,-3802.05 ccw(c2687.23,-3761.94) 2687.23,-3818.67 ccw(c2687.23,-3875.4) Y1.1@2647.12,-3835.29 ; C28.1@2731.66,-3931.93 ccw(c2710.32,-3910.59) 2740.5,-3910.59 ccw(c2770.68,-3910.59) C28.1@2749.34,-3931.93
XTAL2: C27.1 U8.7 Y1.2 | length 780
  Top Layer w15: U8.7@2232,-3570.67 2232,-3727.67 2280,-3775.67 2420,-3775.67 2430.5,-3786.17 ; C27.1@2326.66,-3931.83 ccw(c2305.32,-3910.49) 2335.5,-3910.49 ccw(c2365.68,-3910.49) C27.1@2344.34,-3931.83 ; C27.1@2335.5,-3945.67 2335.5,-3848.67 2365.5,-3818.67 Y1.2@2430.5,-3818.67 2430.5,-3786.17 ; Y1.2@2413.88,-3835.29 ccw(c2373.77,-3875.4) 2373.77,-3818.67 ccw(c2373.77,-3761.94) Y1.2@2413.88,-3802.05 ; Y1.2@2423.14,-3796.35 ccw(c2419.78,-3786.17) 2430.5,-3786.17 ; Y1.2@2437.86,-3796.35 cw(c2441.22,-3786.17) 2430.5,-3786.17
模块选择: C38.1 R66.1 R67.2 U8.33 | length 380.8
  Top Layer w10: R67.2@1945,-2970.67 1947.5,-2968.17 R66.1@2040,-2968.17 2044,-2972.17 U8.33@2044,-3080.67 ; R67.2@1960.61,-2981.28 cw(c1992.25,-3012.92) 1992.25,-2968.17 ; R67.2@1960.61,-2960.06 ccw(c1980.18,-2940.49) 1980.18,-2968.17 ; R66.1@2024.39,-2978.78 ccw(c1998.79,-3004.38) 1998.79,-2968.17 ccw(c1998.79,-2931.96) R66.1@2024.39,-2957.56 ; R66.1@2034.39,-2978.78 cw(c2011.2,-3001.97) 2044,-3001.97 ; 2044,-3006.8 cw(c2083.63,-3006.8) R66.1@2055.61,-2978.78
pads on no net: P11.2 P11.7 P11.9 P11.10 P12.2 P12.8 P12.9 P12.10 P13.9 P13.10 P14.9 P14.10 U1.5 U1.6 U1.7 U1.10 U1.11 U1.12 U2.4 U3.4
copper on no net: | length 4
  Bottom Layer w10: 177.17,-4409.45 180,-4406.61
  other v1: 4065,-2690

## Polygon pours and split planes (outlines as drawn)
GND on Top Layer "GND" (solid, remove dead copper, shelved, pour order 4): 365,-30.67 365,-550.67 cw(c265,-550.67) 265,-650.67 110,-650.67 ccw(c110,-730.67) 30,-730.67 30,-795.67 30,-2735.67 ccw(c130,-2735.67) 130,-2835.67 745,-2835.67 cw(c745,-2900.67) 810,-2900.67 810,-2940.67 810,-4275.67 cw(c780,-4275.67) 780,-4305.67 460,-4305.67 ccw(c460,-4405.67) 360,-4405.67 360,-4465.67 360,-4535.67 ccw(c460,-4535.67) 460,-4635.67 1760,-4635.67 2365,-4635.67 ccw(c2365,-4535.67) 2465,-4535.67 2465,-4420.67 2465,-4350.67 cw(c2565,-4350.67) 2565,-4250.67 2750,-4250.67 2765,-4250.67 ccw(c2765,-4150.67) 2865,-4150.67 2865,-4145.67 2865,-685.67 ccw(c2805,-685.67) 2805,-625.67 2590,-625.67 cw(c2590,-525.67) 2490,-525.67 2490,-415.67 2490,-115.67 ccw(c2390,-115.67) 2390,-15.67 400,-15.67 390,-15.67 ccw(c390,-40.67) 365,-40.67
GND on Bottom Layer "GND" (solid, remove dead copper, shelved, pour order 4): 365,-30.67 365,-550.67 cw(c265,-550.67) 265,-650.67 110,-650.67 ccw(c110,-730.67) 30,-730.67 30,-795.67 30,-2735.67 ccw(c130,-2735.67) 130,-2835.67 745,-2835.67 cw(c745,-2900.67) 810,-2900.67 810,-2940.67 810,-4275.67 cw(c780,-4275.67) 780,-4305.67 460,-4305.67 ccw(c460,-4405.67) 360,-4405.67 360,-4465.67 360,-4535.67 ccw(c460,-4535.67) 460,-4635.67 1760,-4635.67 2365,-4635.67 ccw(c2365,-4535.67) 2465,-4535.67 2465,-4420.67 2465,-4350.67 cw(c2565,-4350.67) 2565,-4250.67 2750,-4250.67 2765,-4250.67 ccw(c2765,-4150.67) 2865,-4150.67 2865,-4145.67 2865,-685.67 ccw(c2805,-685.67) 2805,-625.67 2590,-625.67 cw(c2590,-525.67) 2490,-525.67 2490,-415.67 2490,-115.67 ccw(c2390,-115.67) 2390,-15.67 400,-15.67 390,-15.67 ccw(c390,-40.67) 365,-40.67

## Keep-outs
Keep-Out Layer:
  lines w10: 0,-4527.56 ccw(c118.11,-4527.56) 118.11,-4645.67 ; 0,-118.11 cw(c118.11,-118.11) 118.11,0 ; 255.51,-4296.09 ccw(c177.17,-4409.45) 258.84,-4298.47 ; 255.51,-122.86 ccw(c177.17,-236.22) 258.84,-125.24 ; 1515.34,-2209.31 ccw(c1437,-2322.67) 1518.68,-2211.69 ; 2755.91,-4645.67 ccw(c2755.91,-4527.56) 2874.02,-4527.56 ; 2755.91,0 cw(c2755.91,-118.11) 2874.02,-118.11 ; 2775.19,-4296.09 ccw(c2696.85,-4409.45) 2778.53,-4298.47 ; 2775.19,-122.86 ccw(c2696.85,-236.22) 2778.53,-125.24 ; 0,-4645.67 2874.02,-4645.67 ; 0,-4645.67 0,0 ; 0,-4645.67 0,0 ; 0,-4645.67 2874.02,-4645.67 ; 0,0 2874.02,0 ; 0,0 2874.02,0 ; 2874.02,-4645.67 2874.02,0 ; 2874.02,-4645.67 2874.02,0

## Silkscreen, mask and mechanical layers (free items; w line width, h text height)
Top Overlay:
  lines w10: 1205,-670.67 1430,-670.67 1485,-615.67 ; 1212.86,-143.67 1664.46,-143.67 ; 1213.86,-18.23 1664.46,-18.23 ; 1450,-615.67 1485,-615.67 ; 1485,-650.67 1485,-615.67 ; 1549.94,-2870.67 1890,-2870.67 ; 1670,-1780.67 1690,-1760.67 ; 1690,-1945.67 1690,-1760.67 ; 1710,-1780.67 1690,-1760.67 ; 1870,-2890.67 1890,-2870.67 ; 1870,-2850.67 1890,-2870.67
  lines w20: 1785,-4430.67 1830,-4430.67 1830,-4135.67 ; 1800,-4165.67 1830,-4135.67 ; 1860,-4165.67 1830,-4135.67
  lines w50: 935,-2575.67 1020,-2660.67 ; 1020,-1750.67 1020,-2660.67 ; 1105,-2575.67 1020,-2660.67
  text "5V" at 1450,-235 h50 r90
  text "GND" at 1390,-245 h50 r90
  text "12V" at 1505,-245 h50 r90
  text "NUSE" at 1280,-255 h50 r90
  text "485A" at 1335,-255 h50 r90
  text "5V" at 1460,-345 h50 r90
  text "12V" at 1510,-350 h50 r90
  text "GND" at 1400,-355 h50 r90
  text "NUSE" at 1280,-360 h50 r90
  text "485B" at 1335,-365 h50 r90
  text "AO4" at 1265,-455 h50
  text "AO2" at 1460,-455 h50
  text "AO1" at 1550,-455 h50
  text "AO3" at 1355,-460 h50
  text "弹起AO为电压输出" at 1345,-500 h50
  text "按下AO为电流输出" at 1340,-560 h50
  text "电压电流输出" at 115,-1045 h50 r90
  text "按下AI为电流输入" at 1665,-1655.67 h50 r90
  text "端口1" at 1005,-1690.67 h50 r90
  text "弹起AI为电压输入" at 1665.07,-1725.67 h50 r90
  text "输出" at 1065,-1735.67 h50 r90
  text "模拟量" at 1130,-1735.67 h50 r90
  text "电压电流输入" at 110,-1850 h50 r90
  text "1-4" at 1056.86,-1860.67 h50 r90
  text "AI4" at 1720,-1865.67 h50 r90
  text "AI1" at 2530,-1865.67 h50 r90
  text "AI3" at 1985,-1867.08 h50 r90
  text "AI2" at 2250,-1867.08 h50 r90
  text "输入" at 1065,-2015.67 h50 r90
  text "模拟量" at 1130,-2015.67 h50 r90
  text "1-4" at 1056.86,-2140.67 h50 r90
  text "输入" at 1065,-2325.67 h50 r90
  text "数字量" at 1129.7,-2325.67 h50 r90
  text "4-1" at 1056.86,-2445.67 h50 r90
  text "数字量输入" at 110,-2555 h50 r90
  text "GND" at 2570.05,-2685.67 h50 r90
  text "端口3" at 985,-2770.67 h50 r90
  text "TDI" at 2594.16,-2787.13 h50 r90
  text "模块选择电阻" at 1555,-2855.67 h50 r90
  text "TDO" at 2575.31,-2887.67 h50 r90
  text "6种模式" at 1555,-2915.67 h50 r90
  text "TMS" at 2576.24,-2988.67 h50 r90
  text "TCK]" at 2575.17,-3083.66 h50 r90
  text "VCC" at 2580.21,-3190.67 h50 r90
  text "GND" at 2775,-4015.67 h50 r90
  text "按下为有源DI输入" at 1430,-4040.67 h50 r90
  text "弹起为无源DI输入" at 1430.07,-4110.67 h50 r90
  text "VCC" at 2805,-4280.67 h50 r90
  text "DI1" at 790,-4290.67 h50 r90
  text "DI2" at 1035,-4290.67 h50 r90
  text "DI3" at 1285,-4290.67 h50 r90
  text "DI4" at 1525,-4290.67 h50 r90
  text "GND" at 1790,-4505.67 h50 r90
  text "MOSI" at 1885,-4505.67 h50 r90
  text "MISO" at 1990,-4505.67 h50 r90
  text "SCK" at 2105,-4505.67 h50 r90
  text "RES" at 2205,-4505.67 h50 r90
  text "VCC" at 2300,-4505.67 h50 r90
Bottom Overlay:
  text "5V" at 2188.8,-302.79 h50 r90
  text "NUSE" at 1895,-303.67 h50 r90
  text "485A" at 2001.25,-303.67 h50 r90
  text "GND" at 2105,-303.67 h50 r90
  text "12V" at 2290,-303.67 h50 r90
  text "5V" at 953.8,-307.79 h50 r90
  text "NUSE" at 660,-308.67 h50 r90
  text "485A" at 766.25,-308.67 h50 r90
  text "GND" at 870,-308.67 h50 r90
  text "12V" at 1055,-308.67 h50 r90
  text "5V" at 2188.8,-347.79 h50 r90
  text "NUSE" at 1895,-348.67 h50 r90
  text "485B" at 2001.25,-348.67 h50 r90
  text "GND" at 2105,-348.67 h50 r90
  text "12V" at 2290,-348.67 h50 r90
  text "5V" at 953.8,-352.79 h50 r90
  text "NUSE" at 660,-353.67 h50 r90
  text "485B" at 766.25,-353.67 h50 r90
  text "GND" at 870,-353.67 h50 r90
  text "12V" at 1055,-353.67 h50 r90
  text "GND" at 490,-775.67 h50 r90
  text "AO1" at 705,-780.67 h50 r90
  text "GND" at 490,-942.34 h50 r90
  text "AO2" at 705,-945.67 h50 r90
  text "GND" at 490,-1109 h50 r90
  text "AO3" at 705,-1110.67 h50 r90
  text "GND" at 490,-1275.67 h50 r90
  text "AO4" at 705,-1275.67 h50 r90
  text "GND" at 485,-1495.67 h50 r90
  text "AI1" at 700,-1500.67 h50 r90
  text "GND" at 485,-1662.34 h50 r90
  text "AI2" at 700,-1665.67 h50 r90
  text "GND" at 485,-1829 h50 r90
  text "AI3" at 700,-1830.67 h50 r90
  text "GND" at 485,-1995.67 h50 r90
  text "AI4" at 700,-1995.67 h50 r90
  text "-DI4" at 490,-2240.67 h50 r90
  text "+DI4" at 705,-2245.67 h50 r90
  text "-DI3" at 490,-2407.34 h50 r90
  text "+DI3" at 705,-2410.67 h50 r90
  text "-DI2" at 490,-2574 h50 r90
  text "+DI2" at 705,-2575.67 h50 r90
  text "GND" at 2649.95,-2685.67 h50 r90
  text "-DI1" at 490,-2740.67 h50 r90
  text "+DI1" at 705,-2740.67 h50 r90
  text "TDI" at 2625.84,-2787.13 h50 r90
  text "TDO" at 2644.69,-2887.67 h50 r90
  text "TMS" at 2643.76,-2988.67 h50 r90
  text "TCK]" at 2644.83,-3083.66 h50 r90
  text "VCC" at 2639.79,-3190.67 h50 r90
  text "CL_MODEULE_V1.0" at 2281,-3901.67 h50 r90
  text "GND" at 1870,-4505.67 h50 r90
  text "MOSI" at 1975,-4505.67 h50 r90
  text "MISO" at 2080,-4505.67 h50 r90
  text "SCK" at 2165,-4505.67 h50 r90
  text "RES" at 2260,-4505.67 h50 r90
  text "VCC" at 2370,-4505.67 h50 r90
Mechanical 1:
  lines w10: 0,-4527.56 ccw(c118.11,-4527.56) 118.11,-4645.67 ; 0,-118.11 cw(c118.11,-118.11) 118.11,0 ; 210.74,-4360.87 ccw(c177.17,-4409.45) 212.17,-4361.89 ; 210.74,-187.64 ccw(c177.17,-236.22) 212.17,-188.66 ; 1469.53,-2275.6 ccw(c1437,-2322.67) 1470.92,-2276.59 ; 2730.43,-4360.87 ccw(c2696.85,-4409.45) 2731.86,-4361.89 ; 2730.43,-187.64 ccw(c2696.85,-236.22) 2731.86,-188.66 ; 2755.91,-4645.67 ccw(c2755.91,-4527.56) 2874.02,-4527.56 ; 2755.91,0 cw(c2755.91,-118.11) 2874.02,-118.11 ; 0,-4645.67 2874.02,-4645.67 ; 0,-4645.67 0,0 ; 0,-4645.67 0,0 ; 0,-4645.67 2874.02,-4645.67 ; 0,0 2874.02,0 ; 0,0 2874.02,0 ; 2874.02,-4645.67 2874.02,0 ; 2874.02,-4645.67 2874.02,0
  text "PCB名称: CL_MODEULE_V1.0" at -1468.71,-82.17 h50 r90
  text "尺寸： 11.8CM*7.3CM" at -1468.6,-220.08 h50 r90
  text "板材：  FR4" at -1468.6,-359.01 h50 r90
  text "板子层数：  2" at -1468.6,-497.14 h50 r90
  text "板子厚度：  1.6" at -1468.6,-636.31 h50 r90
  text "阻焊颜色：  蓝色" at -1468.71,-774.55 h50 r90
  text "铜箔厚度：  h/hoz" at -1468.71,-913.72 h50 r90
  text "阻焊覆盖：  过孔盖油" at -1468.71,-1052.53 h50 r90
  text "字符颜色：  白色" at -1468.6,-1190.67 h50 r90
  text "焊盘喷镀：  有铅喷锡" at -1468.6,-1329.72 h50 r90
Drill Drawing:
  text ".Legend" at 2945,-4640.67 h50 r90

## Text inside footprints (layer, text, board x,y; h text height)
C15: Top Overlay "+" at 1501.89,-1311.3 h50 r90
C16: Top Overlay "+" at 2196.89,-1301.3 h50 r90
C36: Top Overlay "+" at 2195,-4030.67 h50 r90
P11: Bottom Overlay "re" at 3191.75,-3007.18 h50 r90; Bottom Overlay "mo" at 3191.75,-3238.49 h50 r90; Bottom Overlay "nc" at 3191.75,-3114.35 h50 r90; Bottom Overlay "ck" at 3191.75,-2920.7 h50 r90; Bottom Overlay "mi" at 3190.99,-2826.7 h50 r90; Bottom Overlay "-" at 2971.3,-2743.58 h50 r90; Bottom Overlay "+" at 2963.42,-3216.02 h50 r90
P12: Bottom Overlay "re" at 2157.82,-4561.75 h80 r180; Bottom Overlay "mo" at 1926.51,-4561.75 h80 r180; Bottom Overlay "nc" at 2050.65,-4561.75 h80 r180; Bottom Overlay "ck" at 2244.3,-4561.75 h80 r180; Bottom Overlay "mi" at 2338.3,-4560.99 h80 r180; Bottom Overlay "-" at 2421.42,-4341.3 h60; Bottom Overlay "+" at 1948.98,-4333.42 h60